# Altium PCB Electrode_Breakout.PcbDoc
Units mil, origin at the board's own origin, x right, y up, seen from the top; angles counter-clockwise.
Board outline 1600 x 1400 mil, 4 copper layers (Top, Ground Plane, Power Plane, Bottom), stack 61.497 mil thick; 7 components, 65 nets, 141 pads, 10 vias.
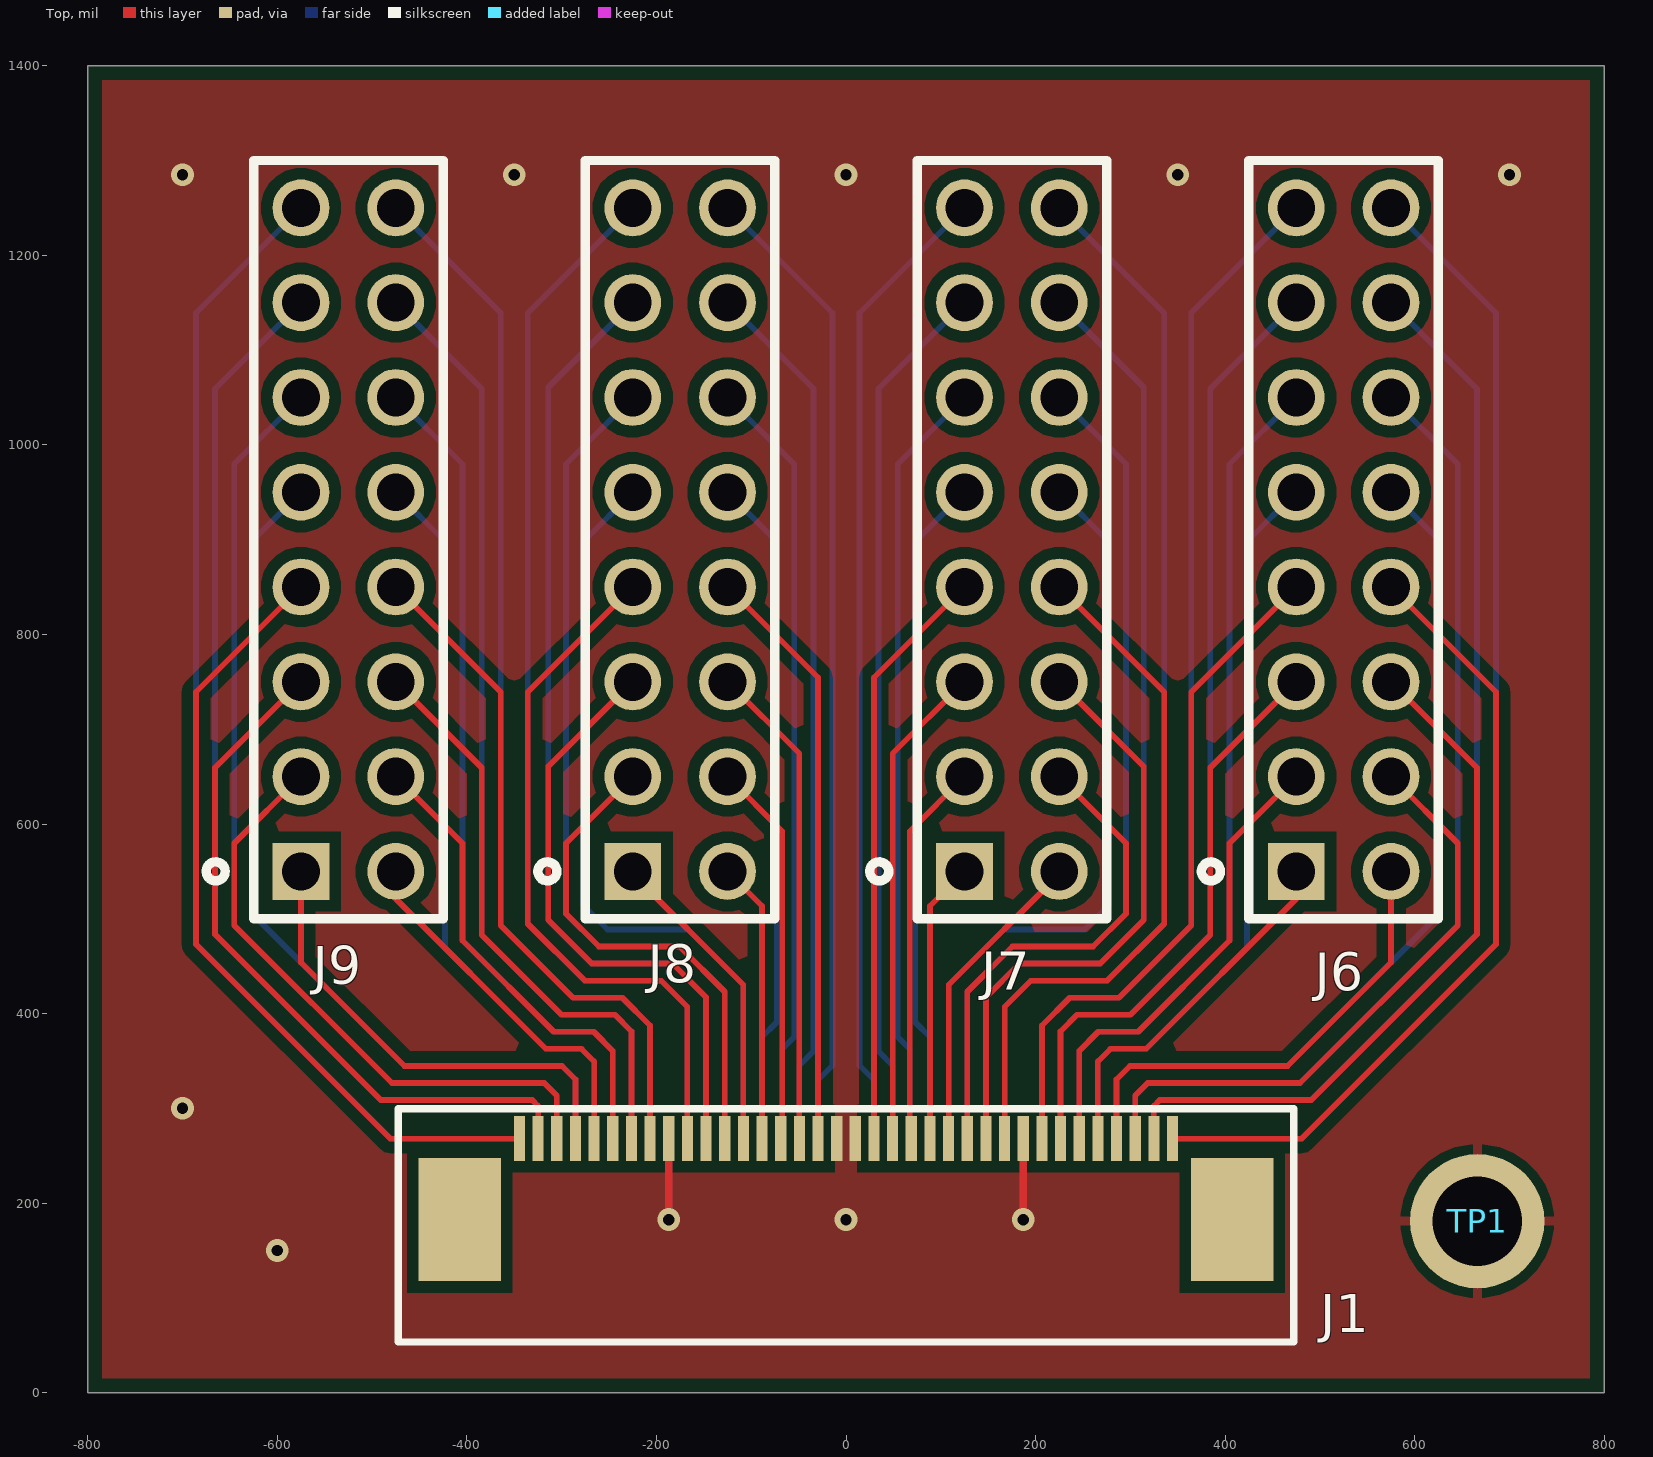
[diagram p0: Top view]
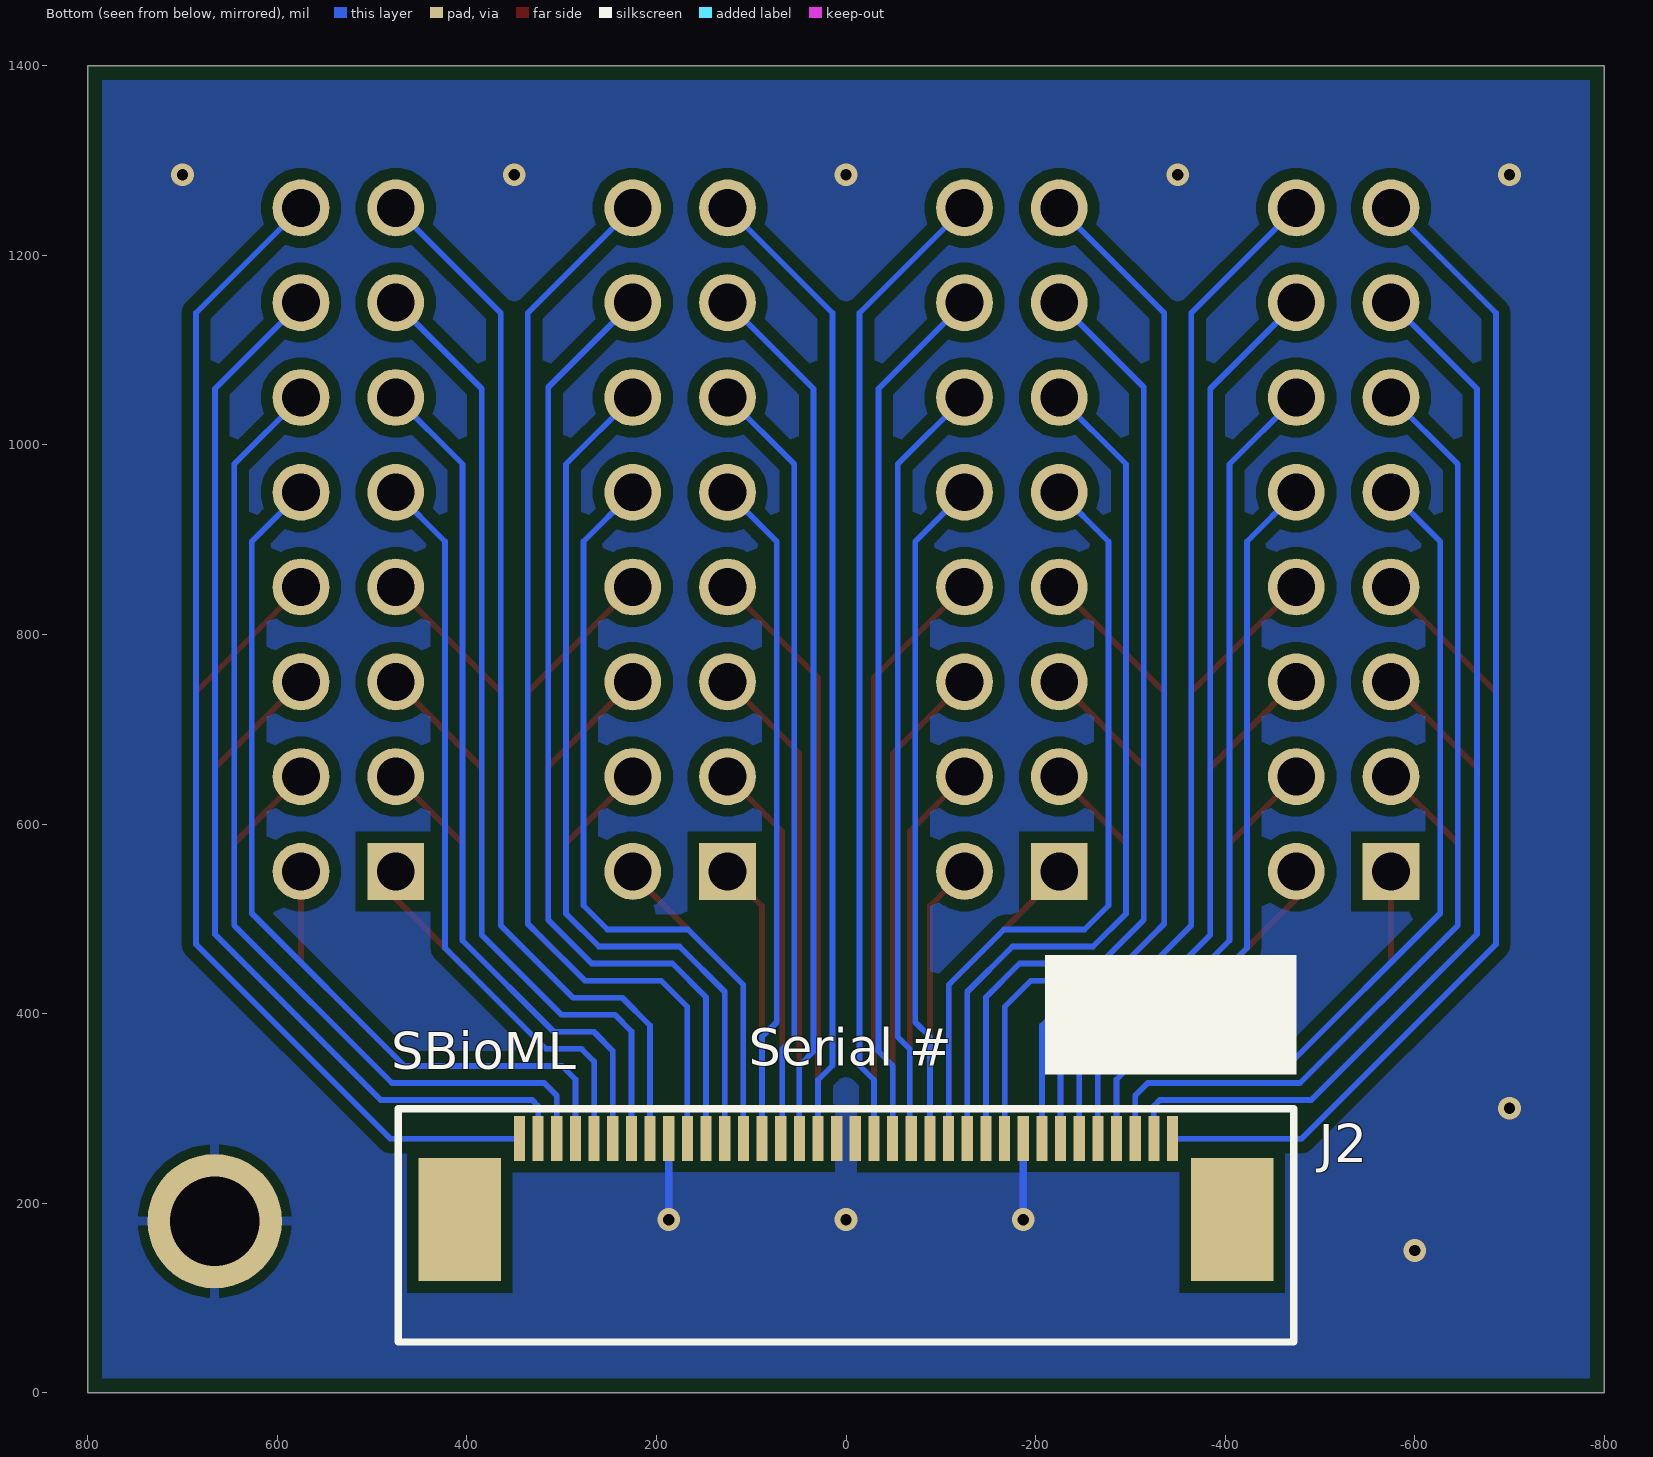
[diagram p1: Bottom view, seen from below]
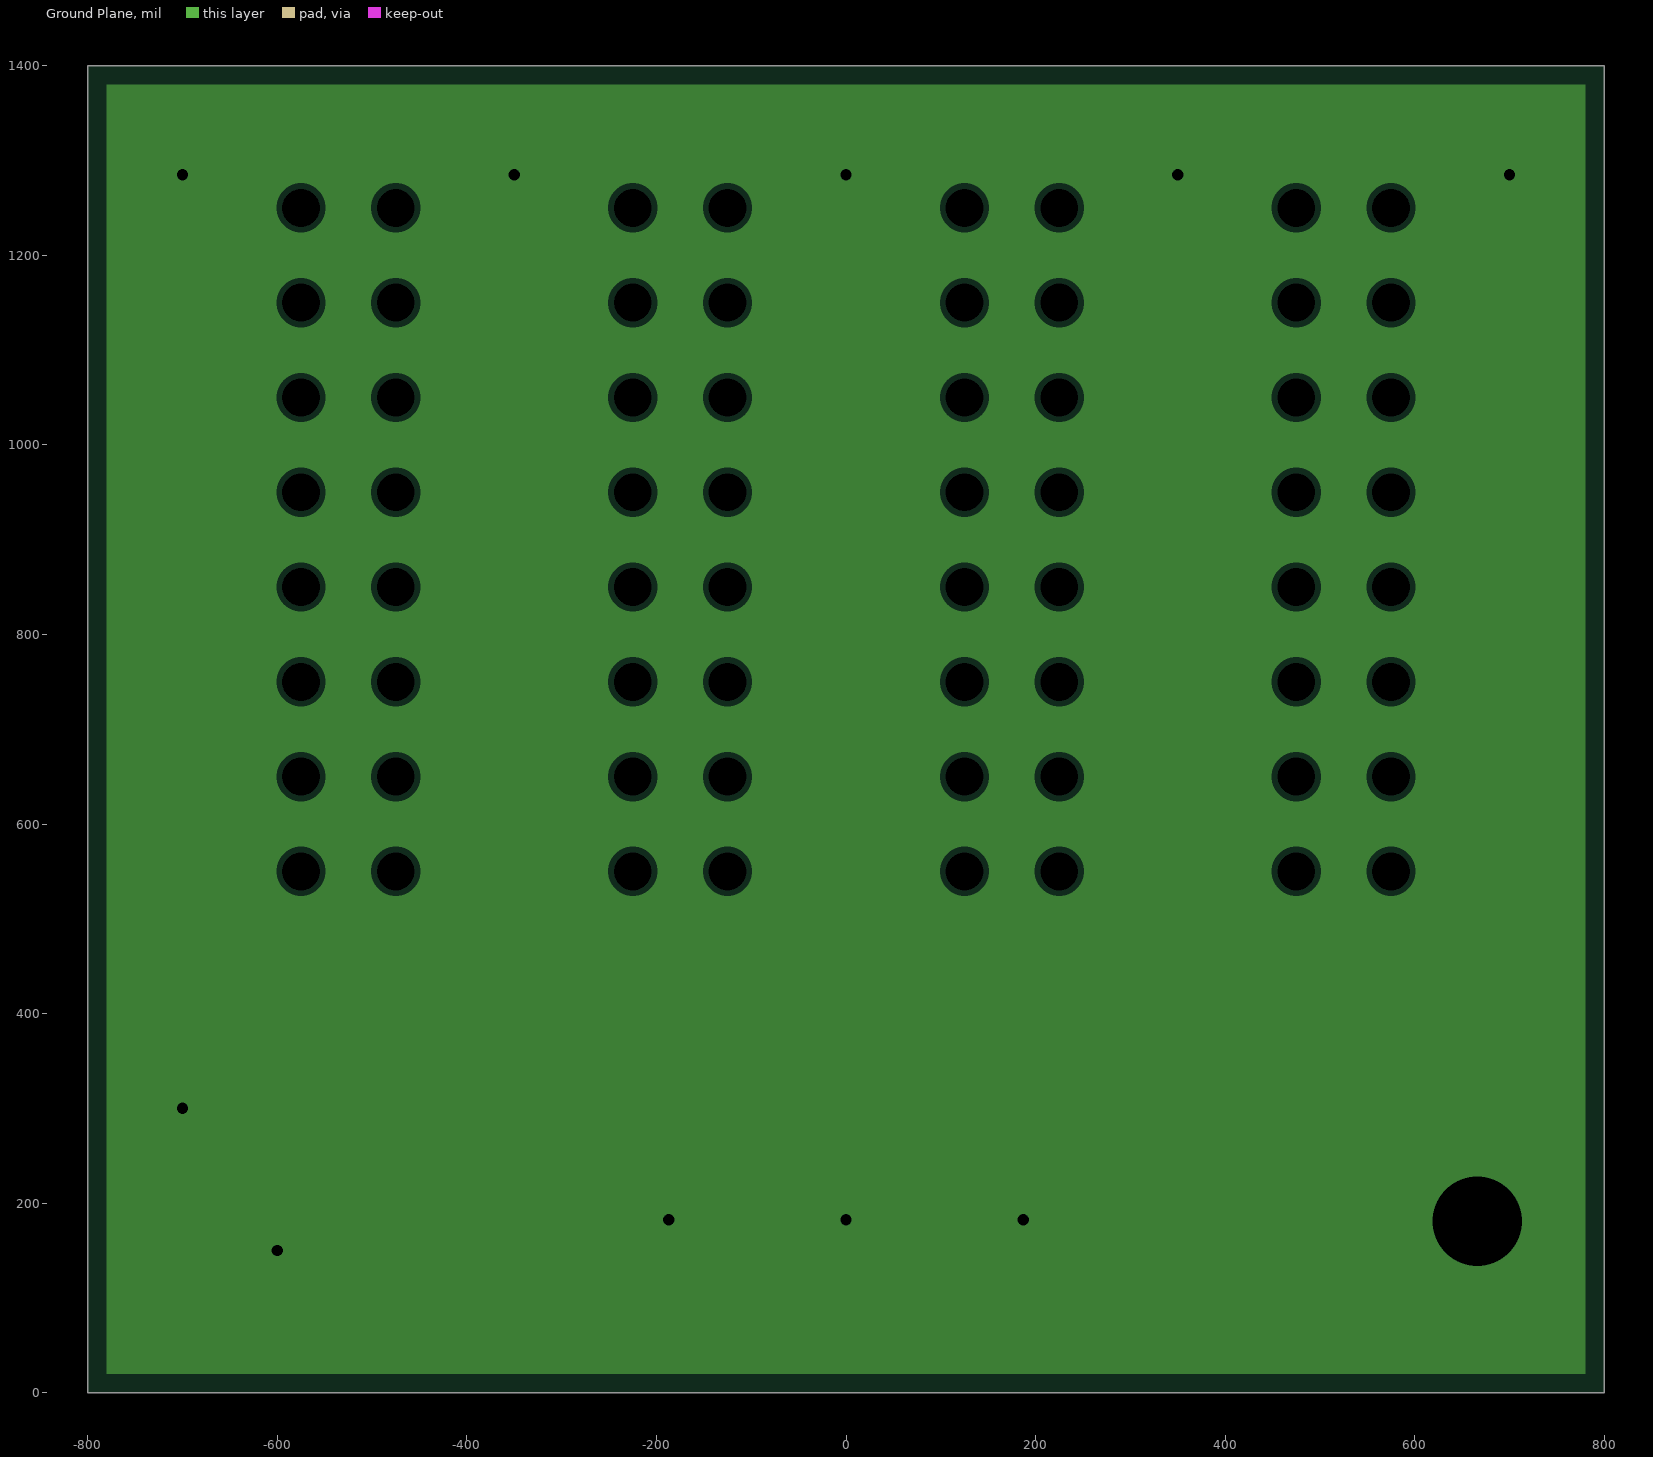
[diagram p2: Ground Plane, clearances drawn from the general rule]
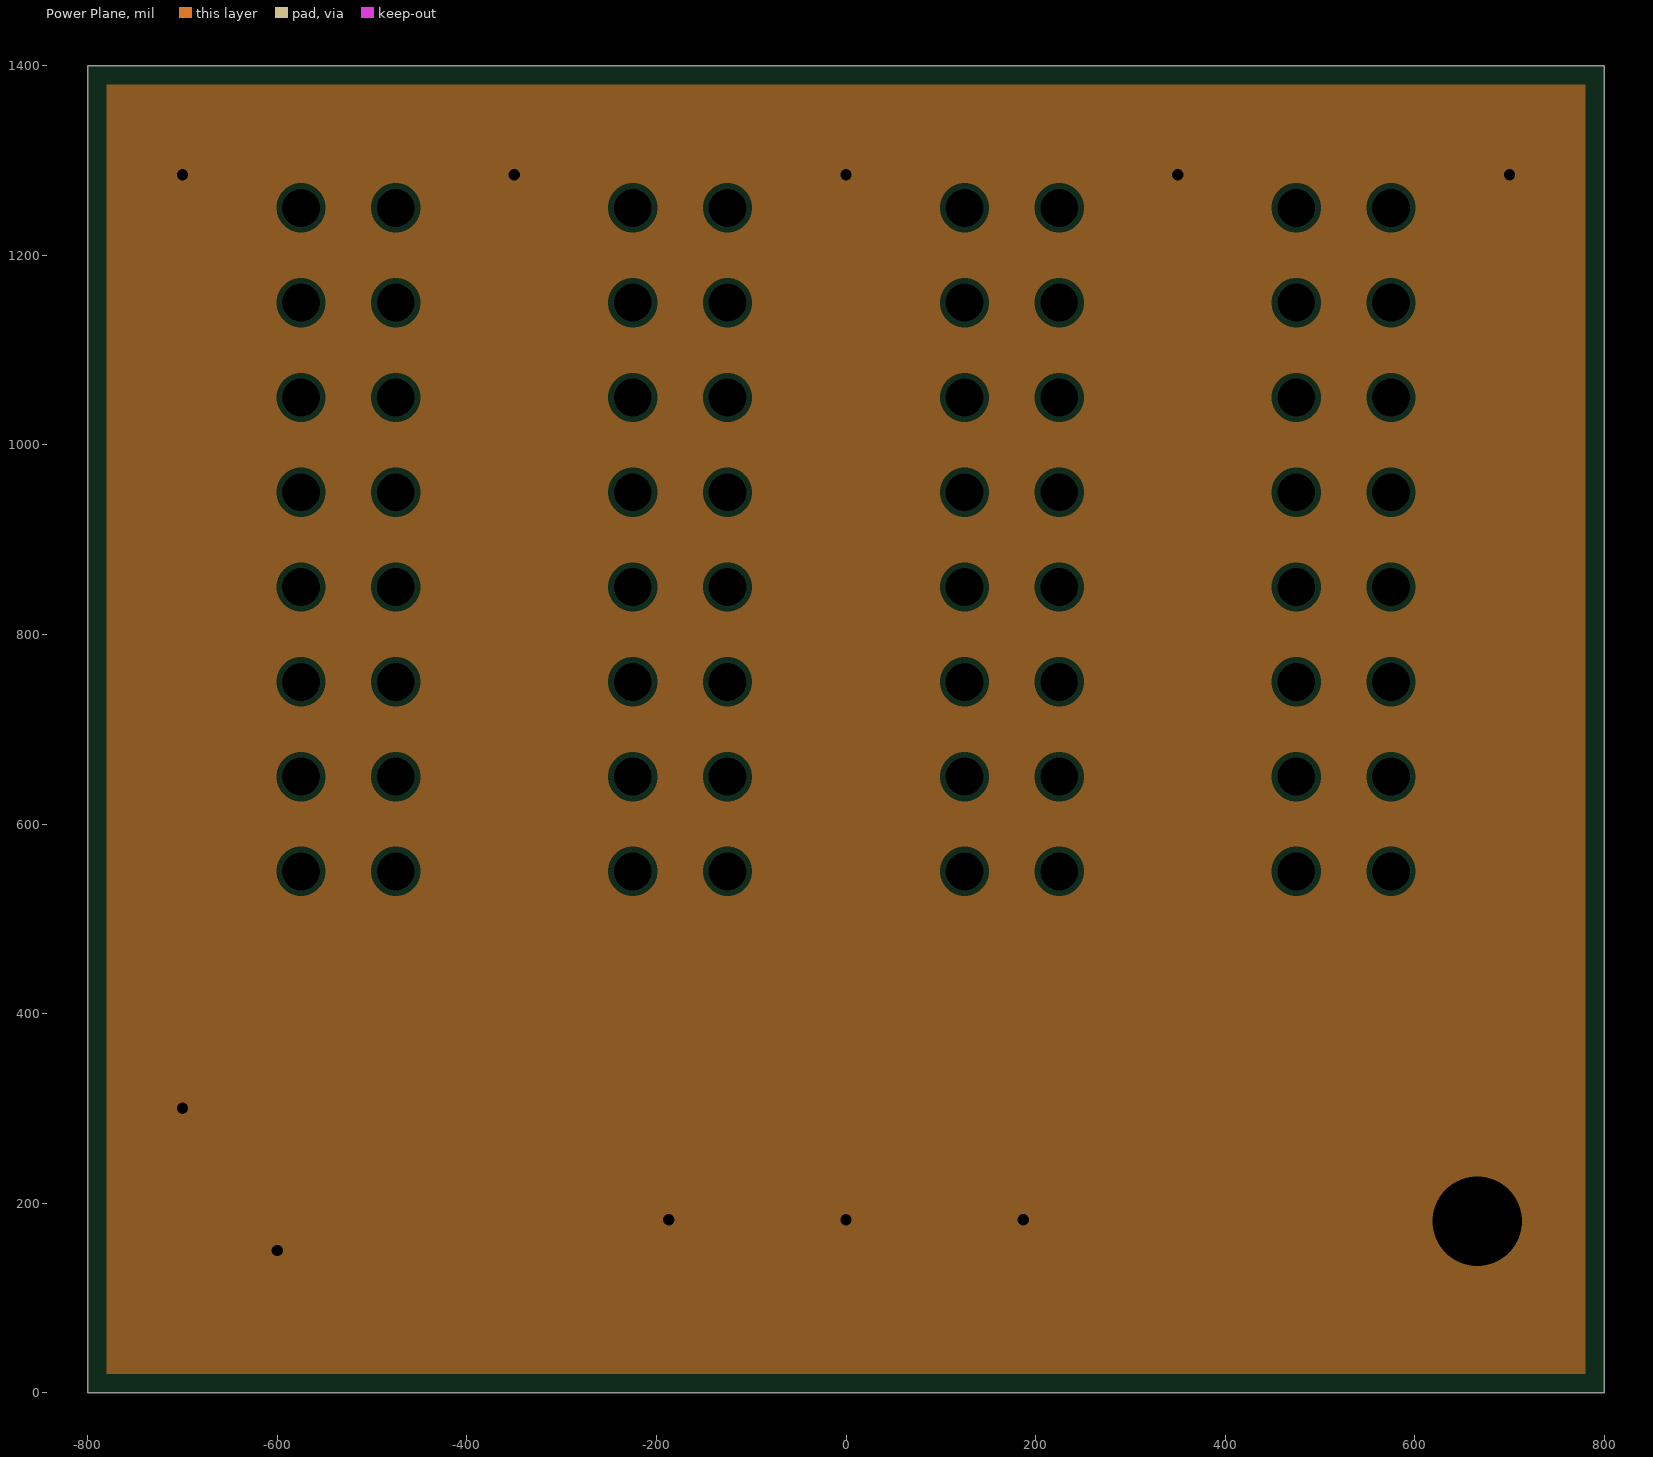
[diagram p3: Power Plane, clearances drawn from the general rule]

## Layer stack, top to bottom
Top Solder: solder mask 0.4, Solder Resist, Dk 3.5
Top: signal copper 1.378
Dielectric 1: prepreg 7.717, FR-4, Dk 4.74
Ground Plane: plane copper 1.378, net REF
Dielectric 3: core 40.551, Dk 4.6
Power Plane: plane copper 1.378, net REF
Dielectric 4: prepreg 7.717, Dk 4.74
Bottom: signal copper 1.378
Bottom Solder: solder mask 0.4, Solder Resist, Dk 3.5

## Board outline
-800,0 -800,1400 800,1400 800,0

## Design rules (kind name [scope] priority, off if disabled: settings)
BoardOutlineClearance [All] p1: gap=15 ignorepadtopadclearanceinfootprint=FALSE
Clearance [All] p1: gap=12 ignorepadtopadclearanceinfootprint=TRUE except(4: SMDPad-SMDPad; 8: Arc-SMDPad Track-SMDPad)
ComponentClearance [All] p1: gap=4 collisioncheckmode=3 verticalgap=4 showdistances=FALSE
HoleSize [All] p1: absolutevalues=TRUE maxlimit=1000 minlimit=4 maxpercent=80.000 minpercent=20.000
HoleToHoleClearance [All] p1: gap=10 allowstackedmicrovias=FALSE
MinimumSolderMaskSliver [All] p1: minsoldermaskwidth=4
PlaneClearance [All] p1: clearance=6
PlaneConnect [All] p1: pad.planeconnectstyle=Relief pad.reliefexpansion=20 pad.reliefentries=4 pad.reliefconductorwidth=10 pad.reliefairgap=10 via.planeconnectstyle=Direct via.reliefexpansion=20 via.reliefentries=4 via.reliefconductorwidth=10 via.reliefairgap=10
PolygonConnect [All] p1: thpad.connectstyle=Relief thpad.reliefconductorwidth=10 thpad.reliefentries=4 thpad.polygonreliefangle="90 Angle" thpad.airgapwidth=10 smdpad.connectstyle=Direct smdpad.reliefconductorwidth=10 smdpad.reliefentries=4 smdpad.polygonreliefangle="90 Angle" smdpad.airgapwidth=10 via.connectstyle=Direct via.reliefconductorwidth=10 via.reliefentries=4 via.polygonreliefangle="90 Angle" via.airgapwidth=10
RoutingVias [All] p1: holewidth=12 width=24 viastyle="Through Hole" minholewidth=12 minwidth=24 maxholewidth=12 maxwidth=24
SilkToSilkClearance [All] p1: silktosilkclearance=4
SilkToSolderMaskClearance [IsPad] p1: minsilkscreentomaskgap=2 clearancetoexposedcopper=FALSE
SolderMaskExpansion [All] p1: expansion=2 istentingtop=TRUE
Width [All] p1: maxlimit=15 minlimit=6 preferedwidth=6 minimp=50.000000 maximp=50.000000 favimp=50.000000
22 further rules are at their usual default settings.

## Components (designator, comment, footprint, x,y, rotation, side; value= is the part's Value field where it differs from the comment)
J1 "3-2492104-6" CON_ZIF_RA_36POS 0,268.07 r0 top locked
J2 "3-2492104-6" CON_ZIF_RA_36POS 0,268.07 r180 bottom
J6 "CON_HEADER_16" CON_HEADER_16 525,900 r90 top locked
J7 "CON_HEADER_16" CON_HEADER_16 175,900 r90 top locked
J8 "CON_HEADER_16" CON_HEADER_16 -175,900 r90 top locked
J9 "CON_HEADER_16" CON_HEADER_16 -525,900 r90 top locked
TP1 "TP_Small" TP_Small_M2 666,181 r0 top

## Footprints (in the part's own frame and the unit in brackets; to place one, negate y for a bottom-side part, rotate by r counter-clockwise, add the part's x,y. Pads: shape width x height; smd on the part's side, far side on the other; paste and mask are expansions set on the pad)
CON_HEADER_16 [mil] "0.1\" pitch"
  rect 60x60 hole 40: 1(-350,50)
  round 60 hole 40: 2(-250,50) 3(-150,50) 4(-50,50) 5(50,50) 6(150,50) 7(250,50) 8(350,50) 9(350,-50) 10(250,-50) 11(150,-50) 12(50,-50) 13(-50,-50) 14(-150,-50) 15(-250,-50) 16(-350,-50)
  silkscreen extent -400,-100 400,100
CON_ZIF_RA_36POS [mm] "3-2492104-6 / 36 Position FPC Connector Contacts, Bottom 0.020\" (0.50mm) Surface Mount, Right Angle"
  rect 0.3x1.2 smd mask+0.025: 1(-8.75,0) 2(-8.25,0) 3(-7.75,0) 4(-7.25,0) 5(-6.75,0) 6(-6.25,0) 7(-5.75,0) 8(-5.25,0) 9(-4.75,0) 10(-4.25,0) 11(-3.75,0) 12(-3.25,0) 13(-2.75,0) 14(-2.25,0) 15(-1.75,0) 16(-1.25,0) 17(-0.75,0) 18(-0.25,0) 19(0.25,0) 20(0.75,0) 21(1.25,0) 22(1.75,0) 23(2.25,0) 24(2.75,0) 25(3.25,0) 26(3.75,0) 27(4.25,0) 28(4.75,0) 29(5.25,0) 30(5.75,0) 31(6.25,0) 32(6.75,0) 33(7.25,0) 34(7.75,0) 35(8.25,0) 36(8.75,0)
  rect 2.2x3.3 smd mask+0.025: M1(-10.35,-2.17) M2(10.35,-2.17)
  silkscreen extent -12,-5.45 12,0.8
TP_Small_M2 [mm]
  round 3.6 hole 2.4: 1(0,0)

## Part data
J1 J2: library part CON_ZIF_RA_36POS, "36 Position FPC Connector Contacts, Bottom 0.020\" (0.50mm) Surface Mount, Right Angle", GRAMS Lib Spec=2.7

## Via types
v1: diameter 24, hole 12, Top to Bottom, tented both sides, 10 vias

## Nets (pads, with @x,y where several pads share a name; then routed paths per layer and width w, separated by ;. In a path a pad name is that pad's centre, name@x,y a point inside that pad or via, vN(x,y) a via of type N, cw(c..) or ccw(c..) an arc to the next point about the centre after c; other vN are vias at no path point)
INPUT_01: J1.1 J9.4 | length 849
  Top w6: J9.4 -685.75,739.25 -685.75,473.07 -480.75,268.07 J1.1
INPUT_02: J1.2 J9.3 | length 754.3
  Top w6: J9.3 -665.72,659.28 -665.72,483.68 -490.8,308.75 -331.02,308.75 -324.8,302.54 J1.2
INPUT_03: J1.3 J9.2 | length 646.1
  Top w6: J9.2 -645.35,579.65 -645.35,493.05 -479.05,326.75 -318.39,326.75 -305.12,313.48 J1.3
INPUT_04: J1.4 J9.1 | length 499.3
  Top w6: J9.1 -575,453.83 -465.92,344.75 -299.59,344.75 -285.43,330.6 J1.4
INPUT_05: J1.5 J9.16 | length 390.6
  Top w6: J9.16 -475,521.14 -316.61,362.75 -279.09,362.75 -265.75,349.41 J1.5
INPUT_06: J1.6 J9.15 | length 501.5
  Top w6: J9.15 -404.65,579.65 -404.65,477 -308.4,380.75 -266.15,380.75 -246.06,360.66 J1.6
INPUT_07: J1.7 J9.14 | length 617.9
  Top w6: J9.14 -384.28,659.28 -384.28,482.91 -300.11,398.75 -243.87,398.75 -226.38,381.25 J1.7
INPUT_08: J1.8 J9.13 | length 723.5
  Top w6: J9.13 -364.25,739.25 -364.25,492.95 -288.05,416.75 -236.06,416.75 -206.69,387.38 J1.8
INPUT_09: J1.10 J8.4 | length 744.8
  Top w6: J8.4 -335.75,739.25 -335.75,494.84 -275.66,434.75 -195,434.75 -167.32,407.07 J1.10
INPUT_10: J1.11 J8.3 | length 637.6
  Top w6: J8.3 -314.18,660.82 -314.18,498.72 -268.21,452.75 -183.21,452.75 -147.64,417.18 J1.11
INPUT_11: J1.12 J8.2 | length 530.2
  Top w6: J8.2 -295.35,579.65 -295.35,505.35 -260.75,470.75 -175.75,470.75 -127.95,422.95 J1.12
INPUT_12: J1.13 J8.1 | length 330.3
  Top w6: J8.1 -225,547.05 -108.27,430.31 J1.13
INPUT_13: J1.14 J8.16 | length 297
  Top w6: J8.16 -88.58,513.58 -88.58,375.35 J1.14
INPUT_14: J1.15 J8.15 | length 406.6
  Top w6: J8.15 -67.21,592.21 -67.21,269.76 J1.15
INPUT_15: J1.16 J8.14 | length 513.3
  Top w6: J8.14 -49.21,674.21 J1.16
INPUT_16: J1.17 J8.13 | length 621.5
  Top w6: J8.13 -29.53,754.53 J1.17
INPUT_17: J1.20 J7.4 | length 621.5
  Top w6: J1.20 29.53,754.53 J7.4
INPUT_18: J1.21 J7.3 | length 513.3
  Top w6: J1.21 49.21,674.21 J7.3
INPUT_19: J1.22 J7.2 | length 406.6
  Top w6: J1.22 67.21,269.76 67.21,592.21 J7.2
INPUT_20: J1.23 J7.1 | length 297
  Top w6: J1.23 88.58,375.35 88.58,513.58 J7.1
INPUT_21: J1.24 J7.16 | length 330.3
  Top w6: J1.24 108.27,430.31 225,547.05 J7.16
INPUT_22: J1.25 J7.15 | length 530.2
  Top w6: J1.25 127.95,422.95 175.75,470.75 260.75,470.75 295.35,505.35 295.35,579.65 J7.15
INPUT_23: J1.26 J7.14 | length 637.6
  Top w6: J1.26 147.64,417.18 183.21,452.75 268.21,452.75 314.18,498.72 314.18,660.82 J7.14
INPUT_24: J1.27 J7.13 | length 744.8
  Top w6: J1.27 167.32,407.07 195,434.75 275.66,434.75 335.75,494.84 335.75,739.25 J7.13
INPUT_25: J1.29 J6.4 | length 723.5
  Top w6: J1.29 206.69,387.38 236.06,416.75 288.05,416.75 364.25,492.95 364.25,739.25 J6.4
INPUT_26: J1.30 J6.3 | length 617.9
  Top w6: J1.30 226.38,381.25 243.87,398.75 300.11,398.75 384.28,482.91 384.28,659.28 J6.3
INPUT_27: J1.31 J6.2 | length 501.5
  Top w6: J1.31 246.06,360.66 266.15,380.75 308.4,380.75 404.65,477 404.65,579.65 J6.2
INPUT_28: J1.32 J6.1 | length 390.6
  Top w6: J1.32 265.75,349.41 279.09,362.75 316.61,362.75 475,521.14 J6.1
INPUT_29: J1.33 J6.16 | length 499.3
  Top w6: J1.33 285.43,330.6 299.59,344.75 465.92,344.75 575,453.83 J6.16
INPUT_30: J1.34 J6.15 | length 646.1
  Top w6: J1.34 305.12,313.48 318.39,326.75 479.05,326.75 645.35,493.05 645.35,579.65 J6.15
INPUT_31: J1.35 J6.14 | length 754.3
  Top w6: J1.35 324.8,302.54 331.02,308.75 490.8,308.75 665.72,483.68 665.72,659.28 J6.14
INPUT_32: J1.36 J6.13 | length 849
  Top w6: J1.36 480.75,268.07 685.75,473.07 685.75,739.25 J6.13
INPUT_33: J2.1 J6.9 | length 1249
  Bottom w6: J2.1 480.75,268.07 685.75,473.07 685.75,1139.25 J6.9
INPUT_34: J2.2 J6.10 | length 1154.3
  Bottom w6: J2.2 324.8,302.54 331.02,308.75 353.35,308.75 490.8,308.75 665.72,483.68 665.72,1059.28 J6.10
INPUT_35: J2.3 J6.11 | length 1046.1
  Bottom w6: J2.3 305.12,313.48 318.39,326.75 341.59,326.75 479.05,326.75 645.35,493.05 645.35,979.65 J6.11
INPUT_36: J2.4 J6.12 | length 942.4
  Bottom w6: J2.4 285.43,330.6 299.59,344.75 329.02,344.75 465.92,344.75 627,505.83 627,898 J6.12
INPUT_37: J2.5 J6.5 | length 790.6
  Bottom w6: J2.5 265.75,349.41 279.09,362.75 316.61,362.75 423,469.14 423,898 J6.5
INPUT_38: J2.6 J6.6 | length 901.5
  Bottom w6: J2.6 246.06,360.66 266.15,380.75 308.4,380.75 404.65,477 404.65,979.65 J6.6
INPUT_39: J2.7 J6.7 | length 1017.9
  Bottom w6: J2.7 226.38,381.25 243.87,398.75 300.11,398.75 384.28,482.91 384.28,1059.28 J6.7
INPUT_40: J2.8 J6.8 | length 1123.5
  Bottom w6: J2.8 206.69,387.38 236.06,416.75 288.05,416.75 364.25,492.95 364.25,1139.25 J6.8
INPUT_41: J2.10 J7.9 | length 1144.8
  Bottom w6: J2.10 167.32,407.07 195,434.75 275.66,434.75 321.63,480.72 335.75,494.84 335.75,1139.25 J7.9
INPUT_42: J2.11 J7.10 | length 1037.6
  Bottom w6: J2.11 147.64,417.18 183.21,452.75 268.21,452.75 314.18,498.72 314.18,1060.82 J7.10
INPUT_43: J2.12 J7.11 | length 930.2
  Bottom w6: J2.12 127.95,422.95 175.75,470.75 260.75,470.75 295.35,505.35 295.35,979.65 J7.11
INPUT_44: J2.13 J7.12 | length 823.2
  Bottom w6: J2.13 108.27,430.31 166.7,488.75 251.75,488.75 277,514 277,898 J7.12
INPUT_45: J2.14 J7.5 | length 709.9
  Bottom w6: J2.14 88.58,375.35 73,390.93 73,898 J7.5
INPUT_46: J2.15 J7.6 | length 817
  Bottom w6: J2.15 67.21,269.76 67.21,362.79 54.65,375.35 54.65,979.65 J7.6
INPUT_47: J2.16 J7.7 | length 925.7
  Bottom w6: J2.16 49.21,345.28 34.28,360.21 34.28,1059.28 J7.7
INPUT_48: J2.17 J7.8 | length 1034.1
  Bottom w6: J2.17 29.53,330 14.25,345.28 14.25,1139.25 J7.8
INPUT_49: J2.20 J8.9 | length 1034.1
  Bottom w6: J8.9 -14.25,1139.25 -14.25,345.28 -29.53,330 J2.20
INPUT_50: J2.21 J8.10 | length 925.7
  Bottom w6: J8.10 -34.28,1059.28 -34.28,360.21 -49.21,345.28 J2.21
INPUT_51: J2.22 J8.11 | length 817
  Bottom w6: J8.11 -54.65,979.65 -54.65,375.35 -67.21,362.79 -67.21,269.76 J2.22
INPUT_52: J2.23 J8.12 | length 709.9
  Bottom w6: J8.12 -73,898 -73,390.93 -88.58,375.35 J2.23
INPUT_53: J2.24 J8.5 | length 823.2
  Bottom w6: J8.5 -277,898 -277,514 -251.75,488.75 -166.7,488.75 -108.27,430.31 J2.24
INPUT_54: J2.25 J8.6 | length 930.2
  Bottom w6: J8.6 -295.35,979.65 -295.35,505.35 -260.75,470.75 -175.75,470.75 -127.95,422.95 J2.25
INPUT_55: J2.26 J8.7 | length 1037.6
  Bottom w6: J8.7 -314.18,1060.82 -314.18,498.72 -268.21,452.75 -183.21,452.75 -147.64,417.18 J2.26
INPUT_56: J2.27 J8.8 | length 1144.8
  Bottom w6: J8.8 -335.75,1139.25 -335.75,494.84 -321.63,480.72 -275.66,434.75 -195,434.75 -167.32,407.07 J2.27
INPUT_57: J2.29 J9.9 | length 1123.5
  Bottom w6: J9.9 -364.25,1139.25 -364.25,492.95 -288.05,416.75 -236.06,416.75 -206.69,387.38 J2.29
INPUT_58: J2.30 J9.10 | length 1017.9
  Bottom w6: J9.10 -384.28,1059.28 -384.28,482.91 -300.11,398.75 -243.87,398.75 -226.38,381.25 J2.30
INPUT_59: J2.31 J9.11 | length 901.5
  Bottom w6: J9.11 -404.65,979.65 -404.65,477 -308.4,380.75 -266.15,380.75 -246.06,360.66 J2.31
INPUT_60: J2.32 J9.12 | length 790.6
  Bottom w6: J9.12 -423,898 -423,469.14 -316.61,362.75 -279.09,362.75 -265.75,349.41 J2.32
INPUT_61: J2.33 J9.5 | length 942.4
  Bottom w6: J9.5 -627,898 -627,505.83 -465.92,344.75 -329.02,344.75 -299.59,344.75 -285.43,330.6 J2.33
INPUT_62: J2.34 J9.6 | length 1046.1
  Bottom w6: J9.6 -645.35,979.65 -645.35,493.05 -479.05,326.75 -341.59,326.75 -318.39,326.75 -305.12,313.48 J2.34
INPUT_63: J2.35 J9.7 | length 1154.3
  Bottom w6: J9.7 -665.72,1059.28 -665.72,483.68 -490.8,308.75 -353.35,308.75 -331.02,308.75 -324.8,302.54 J2.35
INPUT_64: J2.36 J9.8 | length 1249
  Bottom w6: J9.8 -685.75,1139.25 -685.75,473.07 -480.75,268.07 J2.36
REF: J1.9 J1.18 J1.19 J1.28 J2.9 J2.18 J2.19 J2.28 TP1.1 | length 341.7
  Top w8: v1(-187.01,182.64) J1.9 ; v1(187.01,182.64) J1.28
  Bottom w8: v1(-187.01,182.64) J2.28 ; v1(187.01,182.64) J2.9
  other v1: -600,150 0,182.64 -700,300 -700,1285 -350,1285 0,1285 350,1285 700,1285
pads on no net: J1.M1 J1.M2 J2.M1 J2.M2

## Polygon pours and split planes (outlines as drawn)
REF on Bottom "REF_BOT" (solid, remove dead copper, pour order 1): -800,0 -800,1400 800,1400 800,0
REF on Top "REF_TOP" (solid, remove dead copper, pour order 0): -800,0 -800,1400 800,1400 800,0
REF on Power Plane (split plane): 779.9,20.1 -779.9,20.1 -779.9,1379.9 779.9,1379.9
REF on Ground Plane (split plane): 779.9,20.1 -779.9,20.1 -779.9,1379.9 779.9,1379.9

## Silkscreen, mask and mechanical layers (free items; w line width, h text height)
Top Overlay:
  circle w10: c-665,550 r10
  circle w10: c-315,550 r10
  circle w10: c35,550 r10
  circle w10: c385,550 r10
Bottom Overlay:
  rectangle: -475.47,335.75 -210.15,461.75
  text "Serial #" at 102.54,345 h39.37
  text "SBioML" at 479.54,341.52 h39.37
Board Outline:
  the board outline again, w10